# EAGLE board SparkFun_IMU_Breakout_ICM-20948_FET_EVAL-Panel (EAGLE 9.1.3), part 1 of 2
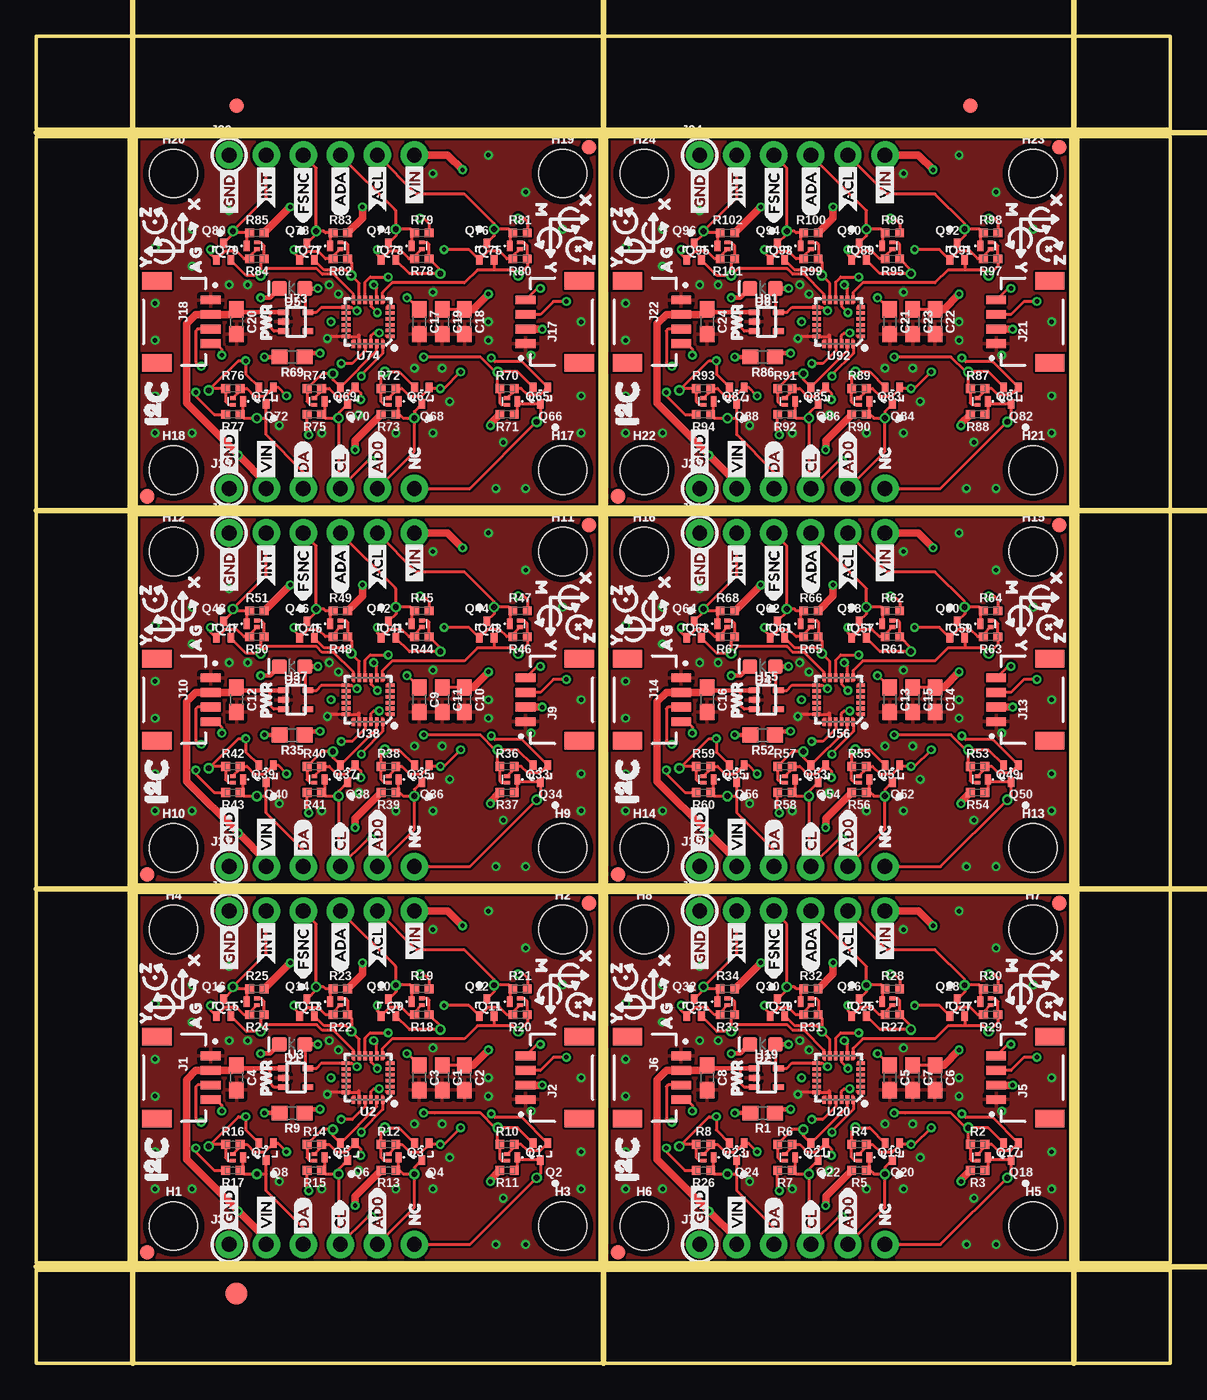
[diagram p0: board, top side]
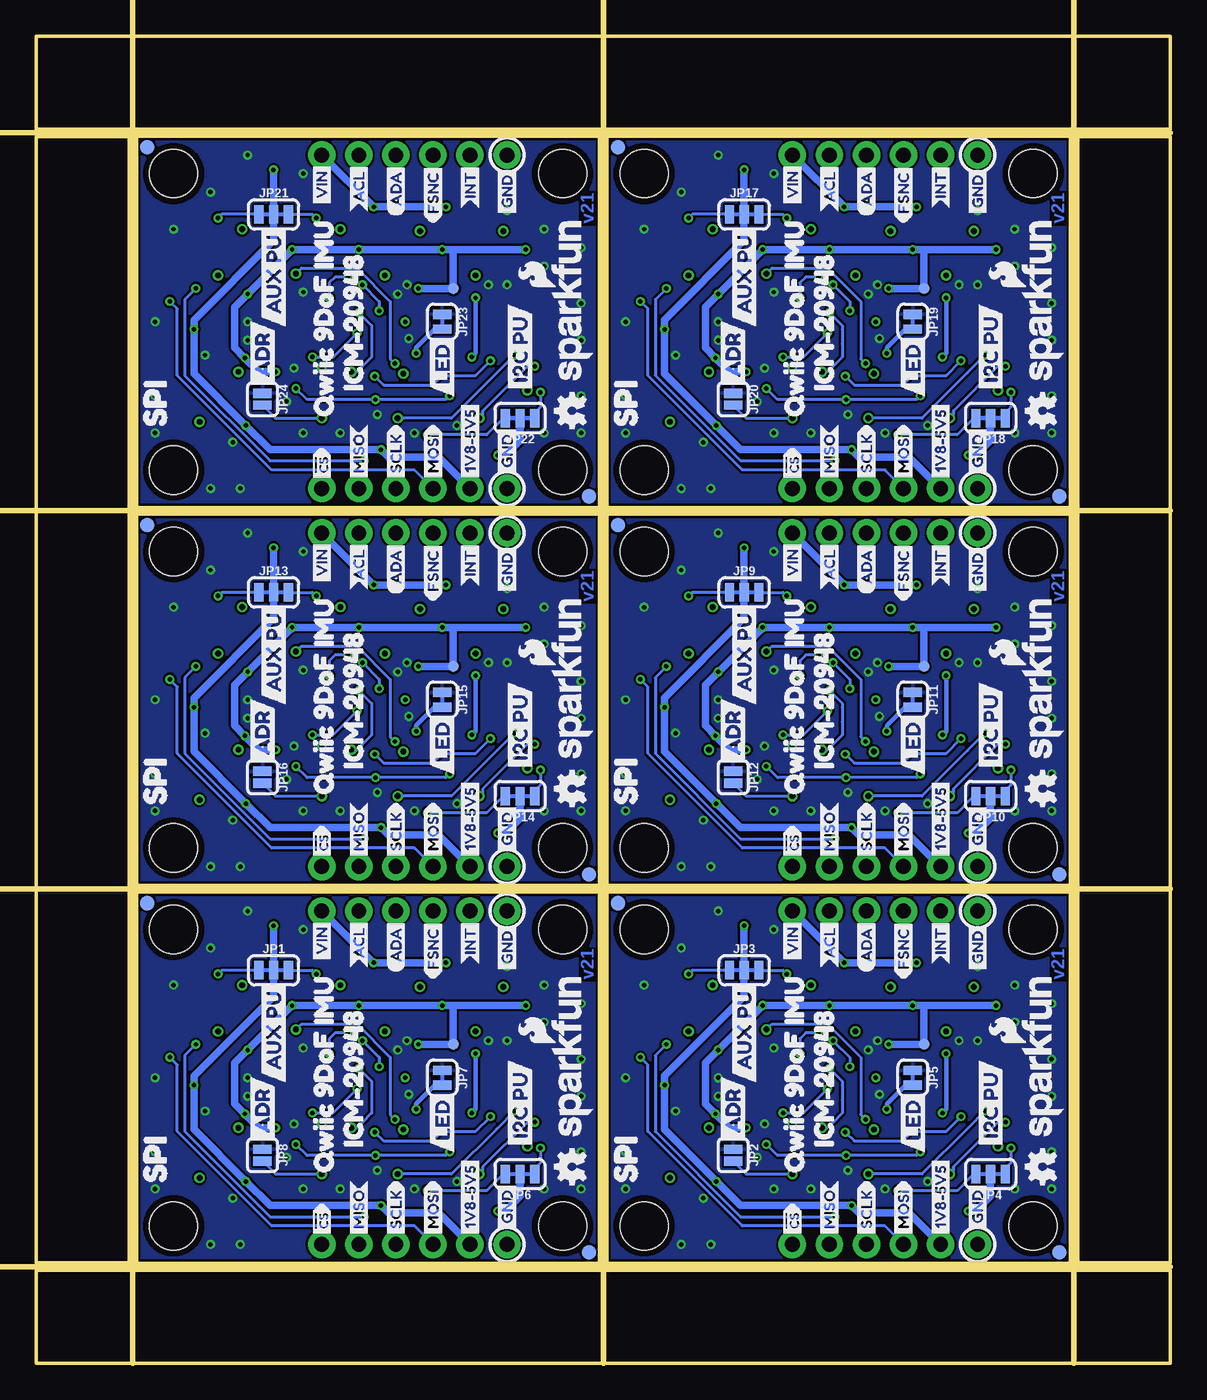
[diagram p1: board, bottom side, seen from below]

Size 77.72 x 90.93 mm. Coordinates in mm from the lower left corner, seen from the top.
Outline: 6.86,6.86 6.86,32.26 38.61,32.26 38.61,6.86 6.86,6.86
Outline: 39.12,6.86 39.12,32.26 70.87,32.26 70.87,6.86 39.12,6.86
Outline: 6.86,32.77 6.86,58.17 38.61,58.17 38.61,32.77 6.86,32.77
Outline: 39.12,32.77 39.12,58.17 70.87,58.17 70.87,32.77 39.12,32.77
Outline: 6.86,58.67 6.86,84.07 38.61,84.07 38.61,58.67 6.86,58.67
Outline: 39.12,58.67 39.12,84.07 70.87,84.07 70.87,58.67 39.12,58.67
Outline: 0,6.35 77.72,6.35 77.72,0 0,0 0,6.35
Outline: 71.37,84.07 77.72,84.07 77.72,6.86 71.37,6.86 71.37,84.07
Outline: 0,90.93 77.72,90.93 77.72,84.58 0,84.58 0,90.93
Outline: 0,84.07 6.35,84.07 6.35,6.86 0,6.86 0,84.07
Copper layers (1*16): Top 0.035mm / dielectric 1.5mm / Bottom 0.035mm
Design rules "SparkFun-2-layer-PCBWay-LIMIT": minimum track width 6mil, minimum drill 0.3mm, track to track 6mil, track to pad 6mil, pad to pad 6mil, via to via 6mil, smd to smd 6mil, copper to edge 6mil, drill to drill 6mil, minimum pad ring 6mil, minimum via ring 6mil, stop-mask expansion 4mil, vias tented up to drill 25mil, thermal gap 10mil
Milling: 7 lines

## Footprints (pad centres in the part's own frame; a part is rotated, then mirrored left to right if it is on the bottom)
0603 = smd 1.1 x 1: 1 -0.85,0; 2 0.85,0
LED-0603 = smd 1 x 1: A -0.877,0; C 0.877,0
FIDUCIAL-1X2 = smd 1 x 1: 1 0,0
FIDUCIAL-1.5X3 = smd 1.5 x 1.5: 1 0,0
STAND-OFF = hole 3.302: 0,0
JST04_1MM_RA = smd 0.6 x 1.35: 1 -1.5,0; 2 -0.5,0; 3 0.5,0; 4 1.5,0 | smd 1.2 x 2: NC1 2.8,-3.675; NC2 -2.8,-3.675
1X06_NO_SILK = drill 1.016 pad 1.88: 1 0,0; 2 2.54,0; 3 5.08,0; 4 7.62,0; 5 10.16,0; 6 12.7,0
SMT-JUMPER_3_2-NC_TRACE_SILK = smd 0.635 x 1.27: 1 -1.016,0; 2 0,0; 3 1.016,0
SMT-JUMPER_2_NO_SILK = smd 0.635 x 1.27: 1 -0.406,0; 2 0.406,0
SMT-JUMPER_2_NC_TRACE_SILK = smd 0.635 x 1.27: 1 -0.508,0; 2 0.508,0
AP02001 = smd 0.4 x 0.7: D 0.7,0 | smd 0.4 x 0.25: G 0,0.225; S 0,-0.225
SOT-416FL = smd 0.46 x 0.65: 1 -0.5,-1.1; 2 0.5,-1.1; 3 0,0.05
0402-TIGHT = smd 0.6 x 0.6: 1 -0.5,0; 2 0.5,0
PAD.03X.03 = smd 0.762 x 0.762: P$1 0,0
MINI_TEST_POINT = drill 0.4: P$1 0,0
QFN24-3X3 = smd 0.495 x 0.25: 1 -1.552,1; 6 -1.552,-1; 13 1.552,-1; 18 1.552,1 | smd 0.6 x 0.25: 2 -1.5,0.6; 3 -1.5,0.2; 4 -1.5,-0.2; 5 -1.5,-0.6; 14 1.5,-0.6; 15 1.5,-0.2; 16 1.5,0.2; 17 1.5,0.6 | smd 0.25 x 0.495: 7 -1,-1.552; 12 1,-1.552; 19 1,1.552; 24 -1,1.552 | smd 0.25 x 0.6: 8 -0.6,-1.5; 9 -0.2,-1.5; 10 0.2,-1.5; 11 0.6,-1.5; 20 0.6,1.5; 21 0.2,1.5; 22 -0.2,1.5; 23 -0.6,1.5
SC70 = smd 0.4 x 0.75: 1 -0.65,-0.825; 2 0,-0.825; 3 0.65,-0.825; 4 0.65,0.825; 5 -0.65,0.825

## Placement (x,y rotation side)
C1  1.0uF  [0603]  27.81,19.56 270 top
C2  0.1uF  [0603]  29.34,19.56 270 top
C3  0.1uF  [0603]  26.24,19.56 270 top
C4  1.0uF  [0603]  13.72,19.56 270 top
C5  0.1uF  [0603]  58.5,19.56 270 top
C6  0.1uF  [0603]  61.59,19.56 270 top
C7  1.0uF  [0603]  60.07,19.56 270 top
C8  1.0uF  [0603]  45.97,19.56 270 top
C9  0.1uF  [0603]  26.24,45.47 270 top
C10  0.1uF  [0603]  29.34,45.47 270 top
C11  1.0uF  [0603]  27.81,45.47 270 top
C12  1.0uF  [0603]  13.72,45.47 270 top
C13  0.1uF  [0603]  58.5,45.47 270 top
C14  0.1uF  [0603]  61.59,45.47 270 top
C15  1.0uF  [0603]  60.07,45.47 270 top
C16  1.0uF  [0603]  45.97,45.47 270 top
C17  0.1uF  [0603]  26.24,71.37 270 top
C18  0.1uF  [0603]  29.34,71.37 270 top
C19  1.0uF  [0603]  27.81,71.37 270 top
C20  1.0uF  [0603]  13.72,71.37 270 top
C21  0.1uF  [0603]  58.5,71.37 270 top
C22  0.1uF  [0603]  61.59,71.37 270 top
C23  1.0uF  [0603]  60.07,71.37 270 top
C24  1.0uF  [0603]  45.97,71.37 270 top
D1  RED  [LED-0603]  17.53,21.84 180 top
D2  RED  [LED-0603]  49.78,21.84 180 top
D3  RED  [LED-0603]  17.53,47.75 180 top
D4  RED  [LED-0603]  49.78,47.75 180 top
D5  RED  [LED-0603]  17.53,73.66 180 top
D6  RED  [LED-0603]  49.78,73.66 180 top
E$1  [FIDUCIAL-1X2]  13.72,86.17 0 top
E$2  [FIDUCIAL-1X2]  64.01,86.17 0 top
E$3  [FIDUCIAL-1.5X3]  13.72,4.76 0 top
FD1  FIDUCIAL1X2  [FIDUCIAL-1X2]  7.59,7.59 0 bottom
FD2  FIDUCIAL1X2  [FIDUCIAL-1X2]  37.87,31.52 0 bottom
FD3  FIDUCIAL1X2  [FIDUCIAL-1X2]  37.87,31.52 0 top
FD4  FIDUCIAL1X2  [FIDUCIAL-1X2]  7.59,7.59 0 top
FD5  FIDUCIAL1X2  [FIDUCIAL-1X2]  70.13,31.52 0 top
FD6  FIDUCIAL1X2  [FIDUCIAL-1X2]  39.85,7.59 0 bottom
FD7  FIDUCIAL1X2  [FIDUCIAL-1X2]  70.13,31.52 0 bottom
FD8  FIDUCIAL1X2  [FIDUCIAL-1X2]  39.85,7.59 0 top
FD9  FIDUCIAL1X2  [FIDUCIAL-1X2]  37.87,57.43 0 top
FD10  FIDUCIAL1X2  [FIDUCIAL-1X2]  7.59,33.5 0 bottom
FD11  FIDUCIAL1X2  [FIDUCIAL-1X2]  37.87,57.43 0 bottom
FD12  FIDUCIAL1X2  [FIDUCIAL-1X2]  7.59,33.5 0 top
FD13  FIDUCIAL1X2  [FIDUCIAL-1X2]  70.13,57.43 0 top
FD14  FIDUCIAL1X2  [FIDUCIAL-1X2]  39.85,33.5 0 bottom
FD15  FIDUCIAL1X2  [FIDUCIAL-1X2]  70.13,57.43 0 bottom
FD16  FIDUCIAL1X2  [FIDUCIAL-1X2]  39.85,33.5 0 top
FD17  FIDUCIAL1X2  [FIDUCIAL-1X2]  37.87,83.34 0 top
FD18  FIDUCIAL1X2  [FIDUCIAL-1X2]  7.59,59.41 0 bottom
FD19  FIDUCIAL1X2  [FIDUCIAL-1X2]  37.87,83.34 0 bottom
FD20  FIDUCIAL1X2  [FIDUCIAL-1X2]  7.59,59.41 0 top
FD21  FIDUCIAL1X2  [FIDUCIAL-1X2]  70.13,83.34 0 top
FD22  FIDUCIAL1X2  [FIDUCIAL-1X2]  39.85,59.41 0 bottom
FD23  FIDUCIAL1X2  [FIDUCIAL-1X2]  70.13,83.34 0 bottom
FD24  FIDUCIAL1X2  [FIDUCIAL-1X2]  39.85,59.41 0 top
H1  STAND-OFF  [STAND-OFF]  9.4,9.4 0 top
H2  STAND-OFF  [STAND-OFF]  36.07,29.72 0 top
H3  STAND-OFF  [STAND-OFF]  36.07,9.4 0 top
H4  STAND-OFF  [STAND-OFF]  9.4,29.72 0 top
H5  STAND-OFF  [STAND-OFF]  68.33,9.4 0 top
H6  STAND-OFF  [STAND-OFF]  41.66,9.4 0 top
H7  STAND-OFF  [STAND-OFF]  68.33,29.72 0 top
H8  STAND-OFF  [STAND-OFF]  41.66,29.72 0 top
H9  STAND-OFF  [STAND-OFF]  36.07,35.31 0 top
H10  STAND-OFF  [STAND-OFF]  9.4,35.31 0 top
H11  STAND-OFF  [STAND-OFF]  36.07,55.63 0 top
H12  STAND-OFF  [STAND-OFF]  9.4,55.63 0 top
H13  STAND-OFF  [STAND-OFF]  68.33,35.31 0 top
H14  STAND-OFF  [STAND-OFF]  41.66,35.31 0 top
H15  STAND-OFF  [STAND-OFF]  68.33,55.63 0 top
H16  STAND-OFF  [STAND-OFF]  41.66,55.63 0 top
H17  STAND-OFF  [STAND-OFF]  36.07,61.21 0 top
H18  STAND-OFF  [STAND-OFF]  9.4,61.21 0 top
H19  STAND-OFF  [STAND-OFF]  36.07,81.53 0 top
H20  STAND-OFF  [STAND-OFF]  9.4,81.53 0 top
H21  STAND-OFF  [STAND-OFF]  68.33,61.21 0 top
H22  STAND-OFF  [STAND-OFF]  41.66,61.21 0 top
H23  STAND-OFF  [STAND-OFF]  68.33,81.53 0 top
H24  STAND-OFF  [STAND-OFF]  41.66,81.53 0 top
J1  [JST04_1MM_RA]  11.94,19.56 270 top
J2  [JST04_1MM_RA]  33.53,19.56 90 top
J3  [1X06_NO_SILK]  13.21,8.13 0 top
J4  [1X06_NO_SILK]  13.21,30.99 0 top
J5  [JST04_1MM_RA]  65.79,19.56 90 top
J6  [JST04_1MM_RA]  44.2,19.56 270 top
J7  [1X06_NO_SILK]  45.47,8.13 0 top
J8  [1X06_NO_SILK]  45.47,30.99 0 top
J9  [JST04_1MM_RA]  33.53,45.47 90 top
J10  [JST04_1MM_RA]  11.94,45.47 270 top
J11  [1X06_NO_SILK]  13.21,34.04 0 top
J12  [1X06_NO_SILK]  13.21,56.9 0 top
J13  [JST04_1MM_RA]  65.79,45.47 90 top
J14  [JST04_1MM_RA]  44.2,45.47 270 top
J15  [1X06_NO_SILK]  45.47,34.04 0 top
J16  [1X06_NO_SILK]  45.47,56.9 0 top
J17  [JST04_1MM_RA]  33.53,71.37 90 top
J18  [JST04_1MM_RA]  11.94,71.37 270 top
J19  [1X06_NO_SILK]  13.21,59.94 0 top
J20  [1X06_NO_SILK]  13.21,82.8 0 top
J21  [JST04_1MM_RA]  65.79,71.37 90 top
J22  [JST04_1MM_RA]  44.2,71.37 270 top
J23  [1X06_NO_SILK]  45.47,59.94 0 top
J24  [1X06_NO_SILK]  45.47,82.8 0 top
JP1  AUX  [SMT-JUMPER_3_2-NC_TRACE_SILK]  61.47,26.92 0 bottom
JP2  ADR  [SMT-JUMPER_2_NO_SILK]  29.97,14.25 270 bottom
JP3  AUX  [SMT-JUMPER_3_2-NC_TRACE_SILK]  29.21,26.92 0 bottom
JP4  I2C PU  [SMT-JUMPER_3_2-NC_TRACE_SILK]  12.32,12.95 180 bottom
JP5  LED  [SMT-JUMPER_2_NC_TRACE_SILK]  17.65,19.56 270 bottom
JP6  I2C PU  [SMT-JUMPER_3_2-NC_TRACE_SILK]  44.58,12.95 180 bottom
JP7  LED  [SMT-JUMPER_2_NC_TRACE_SILK]  49.91,19.56 270 bottom
JP8  ADR  [SMT-JUMPER_2_NO_SILK]  62.23,14.25 270 bottom
JP9  AUX  [SMT-JUMPER_3_2-NC_TRACE_SILK]  29.21,52.83 0 bottom
JP10  I2C PU  [SMT-JUMPER_3_2-NC_TRACE_SILK]  12.32,38.86 180 bottom
JP11  LED  [SMT-JUMPER_2_NC_TRACE_SILK]  17.65,45.47 270 bottom
JP12  ADR  [SMT-JUMPER_2_NO_SILK]  29.97,40.16 270 bottom
JP13  AUX  [SMT-JUMPER_3_2-NC_TRACE_SILK]  61.47,52.83 0 bottom
JP14  I2C PU  [SMT-JUMPER_3_2-NC_TRACE_SILK]  44.58,38.86 180 bottom
JP15  LED  [SMT-JUMPER_2_NC_TRACE_SILK]  49.91,45.47 270 bottom
JP16  ADR  [SMT-JUMPER_2_NO_SILK]  62.23,40.16 270 bottom
JP17  AUX  [SMT-JUMPER_3_2-NC_TRACE_SILK]  29.21,78.74 0 bottom
JP18  I2C PU  [SMT-JUMPER_3_2-NC_TRACE_SILK]  12.32,64.77 180 bottom
JP19  LED  [SMT-JUMPER_2_NC_TRACE_SILK]  17.65,71.37 270 bottom
JP20  ADR  [SMT-JUMPER_2_NO_SILK]  29.97,66.07 270 bottom
JP21  AUX  [SMT-JUMPER_3_2-NC_TRACE_SILK]  61.47,78.74 0 bottom
JP22  I2C PU  [SMT-JUMPER_3_2-NC_TRACE_SILK]  44.58,64.77 180 bottom
JP23  LED  [SMT-JUMPER_2_NC_TRACE_SILK]  49.91,71.37 270 bottom
JP24  ADR  [SMT-JUMPER_2_NO_SILK]  62.23,66.07 270 bottom
LOGO1  SFE_LOGO_NAME_FLAME.1_INCH  [SFE_LOGO_NAME_FLAME_.1]  8.76,21.08 90 bottom
LOGO2  OSHW-LOGOMINI  [OSHW-LOGO-MINI]  8.76,13.46 90 bottom
LOGO3  SFE_LOGO_NAME_FLAME.1_INCH  [SFE_LOGO_NAME_FLAME_.1]  41.02,21.08 90 bottom
LOGO4  OSHW-LOGOMINI  [OSHW-LOGO-MINI]  41.02,13.46 90 bottom
LOGO5  SFE_LOGO_NAME_FLAME.1_INCH  [SFE_LOGO_NAME_FLAME_.1]  8.76,46.99 90 bottom
LOGO6  OSHW-LOGOMINI  [OSHW-LOGO-MINI]  8.76,39.37 90 bottom
LOGO7  SFE_LOGO_NAME_FLAME.1_INCH  [SFE_LOGO_NAME_FLAME_.1]  41.02,46.99 90 bottom
LOGO8  OSHW-LOGOMINI  [OSHW-LOGO-MINI]  41.02,39.37 90 bottom
LOGO9  SFE_LOGO_NAME_FLAME.1_INCH  [SFE_LOGO_NAME_FLAME_.1]  8.76,72.9 90 bottom
LOGO10  OSHW-LOGOMINI  [OSHW-LOGO-MINI]  8.76,65.28 90 bottom
LOGO11  SFE_LOGO_NAME_FLAME.1_INCH  [SFE_LOGO_NAME_FLAME_.1]  41.02,72.9 90 bottom
LOGO12  OSHW-LOGOMINI  [OSHW-LOGO-MINI]  41.02,65.28 90 bottom
Q1  DMN2005LP4K-7  [AP02001]  32.26,14.1 0 top
Q2  RE1C002UN  [SOT-416FL]  34.54,13.97 180 top
Q3  DMN2005LP4K-7  [AP02001]  24.13,14.1 0 top
Q4  RE1C002UN  [SOT-416FL]  26.42,13.97 180 top
Q5  DMN2005LP4K-7  [AP02001]  19.05,14.1 0 top
Q6  RE1C002UN  [SOT-416FL]  21.34,13.97 180 top
Q7  DMN2005LP4K-7  [AP02001]  13.46,14.1 0 top
Q8  RE1C002UN  [SOT-416FL]  15.75,13.97 180 top
Q9  DMN2005LP4K-7  [AP02001]  26.42,24.77 180 top
Q10  RE1C002UN  [SOT-416FL]  24.13,24.89 0 top
Q11  DMN2005LP4K-7  [AP02001]  33.15,24.77 180 top
Q12  RE1C002UN  [SOT-416FL]  30.86,24.89 0 top
Q13  DMN2005LP4K-7  [AP02001]  20.83,24.77 180 top
Q14  RE1C002UN  [SOT-416FL]  18.54,24.89 0 top
Q15  DMN2005LP4K-7  [AP02001]  15.11,24.77 180 top
Q16  RE1C002UN  [SOT-416FL]  12.83,24.89 0 top
Q17  DMN2005LP4K-7  [AP02001]  64.52,14.1 0 top
Q18  RE1C002UN  [SOT-416FL]  66.8,13.97 180 top
Q19  DMN2005LP4K-7  [AP02001]  56.39,14.1 0 top
Q20  RE1C002UN  [SOT-416FL]  58.67,13.97 180 top
Q21  DMN2005LP4K-7  [AP02001]  51.31,14.1 0 top
Q22  RE1C002UN  [SOT-416FL]  53.59,13.97 180 top
Q23  DMN2005LP4K-7  [AP02001]  45.72,14.1 0 top
Q24  RE1C002UN  [SOT-416FL]  48.01,13.97 180 top
Q25  DMN2005LP4K-7  [AP02001]  58.67,24.77 180 top
Q26  RE1C002UN  [SOT-416FL]  56.39,24.89 0 top
Q27  DMN2005LP4K-7  [AP02001]  65.41,24.77 180 top
Q28  RE1C002UN  [SOT-416FL]  63.12,24.89 0 top
Q29  DMN2005LP4K-7  [AP02001]  53.09,24.77 180 top
Q30  RE1C002UN  [SOT-416FL]  50.8,24.89 0 top
Q31  DMN2005LP4K-7  [AP02001]  47.37,24.77 180 top
Q32  RE1C002UN  [SOT-416FL]  45.08,24.89 0 top
Q33  DMN2005LP4K-7  [AP02001]  32.26,40 0 top
Q34  RE1C002UN  [SOT-416FL]  34.54,39.88 180 top
Q35  DMN2005LP4K-7  [AP02001]  24.13,40 0 top
Q36  RE1C002UN  [SOT-416FL]  26.42,39.88 180 top
Q37  DMN2005LP4K-7  [AP02001]  19.05,40 0 top
Q38  RE1C002UN  [SOT-416FL]  21.34,39.88 180 top
Q39  DMN2005LP4K-7  [AP02001]  13.46,40 0 top
Q40  RE1C002UN  [SOT-416FL]  15.75,39.88 180 top
Q41  DMN2005LP4K-7  [AP02001]  26.42,50.67 180 top
Q42  RE1C002UN  [SOT-416FL]  24.13,50.8 0 top
Q43  DMN2005LP4K-7  [AP02001]  33.15,50.67 180 top
Q44  RE1C002UN  [SOT-416FL]  30.86,50.8 0 top
Q45  DMN2005LP4K-7  [AP02001]  20.83,50.67 180 top
Q46  RE1C002UN  [SOT-416FL]  18.54,50.8 0 top
Q47  DMN2005LP4K-7  [AP02001]  15.11,50.67 180 top
Q48  RE1C002UN  [SOT-416FL]  12.83,50.8 0 top
Q49  DMN2005LP4K-7  [AP02001]  64.52,40 0 top
Q50  RE1C002UN  [SOT-416FL]  66.8,39.88 180 top
Q51  DMN2005LP4K-7  [AP02001]  56.39,40 0 top
Q52  RE1C002UN  [SOT-416FL]  58.67,39.88 180 top
Q53  DMN2005LP4K-7  [AP02001]  51.31,40 0 top
Q54  RE1C002UN  [SOT-416FL]  53.59,39.88 180 top
Q55  DMN2005LP4K-7  [AP02001]  45.72,40 0 top
Q56  RE1C002UN  [SOT-416FL]  48.01,39.88 180 top
Q57  DMN2005LP4K-7  [AP02001]  58.67,50.67 180 top
Q58  RE1C002UN  [SOT-416FL]  56.39,50.8 0 top
Q59  DMN2005LP4K-7  [AP02001]  65.41,50.67 180 top
Q60  RE1C002UN  [SOT-416FL]  63.12,50.8 0 top
Q61  DMN2005LP4K-7  [AP02001]  53.09,50.67 180 top
Q62  RE1C002UN  [SOT-416FL]  50.8,50.8 0 top
Q63  DMN2005LP4K-7  [AP02001]  47.37,50.67 180 top
Q64  RE1C002UN  [SOT-416FL]  45.08,50.8 0 top
Q65  DMN2005LP4K-7  [AP02001]  32.26,65.91 0 top
Q66  RE1C002UN  [SOT-416FL]  34.54,65.79 180 top
Q67  DMN2005LP4K-7  [AP02001]  24.13,65.91 0 top
Q68  RE1C002UN  [SOT-416FL]  26.42,65.79 180 top
Q69  DMN2005LP4K-7  [AP02001]  19.05,65.91 0 top
Q70  RE1C002UN  [SOT-416FL]  21.34,65.79 180 top
Q71  DMN2005LP4K-7  [AP02001]  13.46,65.91 0 top
Q72  RE1C002UN  [SOT-416FL]  15.75,65.79 180 top
Q73  DMN2005LP4K-7  [AP02001]  26.42,76.58 180 top
Q74  RE1C002UN  [SOT-416FL]  24.13,76.71 0 top
Q75  DMN2005LP4K-7  [AP02001]  33.15,76.58 180 top
Q76  RE1C002UN  [SOT-416FL]  30.86,76.71 0 top
Q77  DMN2005LP4K-7  [AP02001]  20.83,76.58 180 top
Q78  RE1C002UN  [SOT-416FL]  18.54,76.71 0 top
Q79  DMN2005LP4K-7  [AP02001]  15.11,76.58 180 top
Q80  RE1C002UN  [SOT-416FL]  12.83,76.71 0 top
Q81  DMN2005LP4K-7  [AP02001]  64.52,65.91 0 top
Q82  RE1C002UN  [SOT-416FL]  66.8,65.79 180 top
Q83  DMN2005LP4K-7  [AP02001]  56.39,65.91 0 top
Q84  RE1C002UN  [SOT-416FL]  58.67,65.79 180 top
Q85  DMN2005LP4K-7  [AP02001]  51.31,65.91 0 top
Q86  RE1C002UN  [SOT-416FL]  53.59,65.79 180 top
Q87  DMN2005LP4K-7  [AP02001]  45.72,65.91 0 top
Q88  RE1C002UN  [SOT-416FL]  48.01,65.79 180 top
Q89  DMN2005LP4K-7  [AP02001]  58.67,76.58 180 top
Q90  RE1C002UN  [SOT-416FL]  56.39,76.71 0 top
Q91  DMN2005LP4K-7  [AP02001]  65.41,76.58 180 top
Q92  RE1C002UN  [SOT-416FL]  63.12,76.71 0 top
Q93  DMN2005LP4K-7  [AP02001]  53.09,76.58 180 top
Q94  RE1C002UN  [SOT-416FL]  50.8,76.71 0 top
Q95  DMN2005LP4K-7  [AP02001]  47.37,76.58 180 top
Q96  RE1C002UN  [SOT-416FL]  45.08,76.71 0 top
R1  470  [0603]  49.78,17.14 180 top
R2  2.2k  [0402-TIGHT]  64.52,14.99 0 top
R3  2.2k  [0402-TIGHT]  64.52,13.21 180 top
R4  2.2k  [0402-TIGHT]  56.39,14.99 0 top
R5  2.2k  [0402-TIGHT]  56.39,13.21 180 top
R6  2.2k  [0402-TIGHT]  51.31,14.99 0 top
R7  2.2k  [0402-TIGHT]  51.31,13.21 180 top
R8  2.2k  [0402-TIGHT]  45.72,14.99 0 top
R9  470  [0603]  17.53,17.14 180 top
R10  2.2k  [0402-TIGHT]  32.26,14.99 0 top
R11  2.2k  [0402-TIGHT]  32.26,13.21 180 top
R12  2.2k  [0402-TIGHT]  24.13,14.99 0 top
R13  2.2k  [0402-TIGHT]  24.13,13.21 180 top
R14  2.2k  [0402-TIGHT]  19.05,14.99 0 top
R15  2.2k  [0402-TIGHT]  19.05,13.21 180 top
R16  2.2k  [0402-TIGHT]  13.46,14.99 0 top
R17  2.2k  [0402-TIGHT]  13.46,13.21 180 top
R18  2.2k  [0402-TIGHT]  26.42,23.88 180 top
R19  2.2k  [0402-TIGHT]  26.42,25.65 0 top
R20  2.2k  [0402-TIGHT]  33.15,23.88 180 top
R21  2.2k  [0402-TIGHT]  33.15,25.65 0 top
R22  2.2k  [0402-TIGHT]  20.83,23.88 180 top
R23  2.2k  [0402-TIGHT]  20.83,25.65 0 top
R24  2.2k  [0402-TIGHT]  15.11,23.88 180 top
R25  2.2k  [0402-TIGHT]  15.11,25.65 0 top
R26  2.2k  [0402-TIGHT]  45.72,13.21 180 top
R27  2.2k  [0402-TIGHT]  58.67,23.88 180 top
R28  2.2k  [0402-TIGHT]  58.67,25.65 0 top
R29  2.2k  [0402-TIGHT]  65.41,23.88 180 top
R30  2.2k  [0402-TIGHT]  65.41,25.65 0 top
R31  2.2k  [0402-TIGHT]  53.09,23.88 180 top
R32  2.2k  [0402-TIGHT]  53.09,25.65 0 top
R33  2.2k  [0402-TIGHT]  47.37,23.88 180 top
R34  2.2k  [0402-TIGHT]  47.37,25.65 0 top
R35  470  [0603]  17.53,43.05 180 top
R36  2.2k  [0402-TIGHT]  32.26,40.89 0 top
R37  2.2k  [0402-TIGHT]  32.26,39.12 180 top
R38  2.2k  [0402-TIGHT]  24.13,40.89 0 top
R39  2.2k  [0402-TIGHT]  24.13,39.12 180 top
R40  2.2k  [0402-TIGHT]  19.05,40.89 0 top
R41  2.2k  [0402-TIGHT]  19.05,39.12 180 top
R42  2.2k  [0402-TIGHT]  13.46,40.89 0 top
R43  2.2k  [0402-TIGHT]  13.46,39.12 180 top
R44  2.2k  [0402-TIGHT]  26.42,49.78 180 top
R45  2.2k  [0402-TIGHT]  26.42,51.56 0 top
R46  2.2k  [0402-TIGHT]  33.15,49.78 180 top
R47  2.2k  [0402-TIGHT]  33.15,51.56 0 top
R48  2.2k  [0402-TIGHT]  20.83,49.78 180 top
R49  2.2k  [0402-TIGHT]  20.83,51.56 0 top
R50  2.2k  [0402-TIGHT]  15.11,49.78 180 top
R51  2.2k  [0402-TIGHT]  15.11,51.56 0 top
R52  470  [0603]  49.78,43.05 180 top
R53  2.2k  [0402-TIGHT]  64.52,40.89 0 top
R54  2.2k  [0402-TIGHT]  64.52,39.12 180 top
R55  2.2k  [0402-TIGHT]  56.39,40.89 0 top
R56  2.2k  [0402-TIGHT]  56.39,39.12 180 top
R57  2.2k  [0402-TIGHT]  51.31,40.89 0 top
R58  2.2k  [0402-TIGHT]  51.31,39.12 180 top
R59  2.2k  [0402-TIGHT]  45.72,40.89 0 top
R60  2.2k  [0402-TIGHT]  45.72,39.12 180 top
R61  2.2k  [0402-TIGHT]  58.67,49.78 180 top
R62  2.2k  [0402-TIGHT]  58.67,51.56 0 top
R63  2.2k  [0402-TIGHT]  65.41,49.78 180 top
R64  2.2k  [0402-TIGHT]  65.41,51.56 0 top
R65  2.2k  [0402-TIGHT]  53.09,49.78 180 top
R66  2.2k  [0402-TIGHT]  53.09,51.56 0 top
R67  2.2k  [0402-TIGHT]  47.37,49.78 180 top
R68  2.2k  [0402-TIGHT]  47.37,51.56 0 top
R69  470  [0603]  17.53,68.96 180 top
R70  2.2k  [0402-TIGHT]  32.26,66.8 0 top
R71  2.2k  [0402-TIGHT]  32.26,65.02 180 top
R72  2.2k  [0402-TIGHT]  24.13,66.8 0 top
R73  2.2k  [0402-TIGHT]  24.13,65.02 180 top
R74  2.2k  [0402-TIGHT]  19.05,66.8 0 top
R75  2.2k  [0402-TIGHT]  19.05,65.02 180 top
R76  2.2k  [0402-TIGHT]  13.46,66.8 0 top
R77  2.2k  [0402-TIGHT]  13.46,65.02 180 top
R78  2.2k  [0402-TIGHT]  26.42,75.69 180 top
R79  2.2k  [0402-TIGHT]  26.42,77.47 0 top
R80  2.2k  [0402-TIGHT]  33.15,75.69 180 top
R81  2.2k  [0402-TIGHT]  33.15,77.47 0 top
R82  2.2k  [0402-TIGHT]  20.83,75.69 180 top
R83  2.2k  [0402-TIGHT]  20.83,77.47 0 top
R84  2.2k  [0402-TIGHT]  15.11,75.69 180 top
R85  2.2k  [0402-TIGHT]  15.11,77.47 0 top
R86  470  [0603]  49.78,68.96 180 top
R87  2.2k  [0402-TIGHT]  64.52,66.8 0 top
R88  2.2k  [0402-TIGHT]  64.52,65.02 180 top
R89  2.2k  [0402-TIGHT]  56.39,66.8 0 top
R90  2.2k  [0402-TIGHT]  56.39,65.02 180 top
R91  2.2k  [0402-TIGHT]  51.31,66.8 0 top
R92  2.2k  [0402-TIGHT]  51.31,65.02 180 top
R93  2.2k  [0402-TIGHT]  45.72,66.8 0 top
R94  2.2k  [0402-TIGHT]  45.72,65.02 180 top
R95  2.2k  [0402-TIGHT]  58.67,75.69 180 top
R96  2.2k  [0402-TIGHT]  58.67,77.47 0 top
R97  2.2k  [0402-TIGHT]  65.41,75.69 180 top
R98  2.2k  [0402-TIGHT]  65.41,77.47 0 top
R99  2.2k  [0402-TIGHT]  53.09,75.69 180 top
R100  2.2k  [0402-TIGHT]  53.09,77.47 0 top
R101  2.2k  [0402-TIGHT]  47.37,75.69 180 top
R102  2.2k  [0402-TIGHT]  47.37,77.47 0 top
TP1  1.8V  [PAD.03X.03]  16.89,21.84 90 bottom
TP2  1.8V  [PAD.03X.03]  49.15,21.84 90 bottom
TP3  1.8V  [PAD.03X.03]  16.89,47.75 90 bottom
TP4  1.8V  [PAD.03X.03]  49.15,47.75 90 bottom
TP5  1.8V  [PAD.03X.03]  16.89,73.66 90 bottom
TP6  1.8V  [PAD.03X.03]  49.15,73.66 90 bottom
U1  TP  [MINI_TEST_POINT]  27.69,22.86 180 top
U2  9DoF IMU  [QFN24-3X3]  22.73,19.56 180 top
U3  1.8V/100mA  [SC70]  17.78,19.56 270 top
U4  TP  [MINI_TEST_POINT]  24.64,25.91 180 top
U5  TP  [MINI_TEST_POINT]  33.02,22.73 180 top
U6  TP  [MINI_TEST_POINT]  31.37,25.91 180 top
U7  TP  [MINI_TEST_POINT]  19.18,25.78 180 top
U8  TP  [MINI_TEST_POINT]  21.59,22.73 180 top
U9  TP  [MINI_TEST_POINT]  15.37,22.73 180 top
U10  TP  [MINI_TEST_POINT]  13.46,25.78 180 top
U11  TP  [MINI_TEST_POINT]  11.81,14.86 0 top
U12  TP  [MINI_TEST_POINT]  15.11,12.95 0 top
U13  TP  [MINI_TEST_POINT]  20.32,16 0 top
U14  TP  [MINI_TEST_POINT]  20.7,12.95 0 top
U15  TP  [MINI_TEST_POINT]  23.88,16.13 0 top
U16  TP  [MINI_TEST_POINT]  25.91,12.95 0 top
U17  TP  [MINI_TEST_POINT]  31.62,16.13 0 top
U18  TP  [MINI_TEST_POINT]  34.29,12.7 0 top
U19  1.8V/100mA  [SC70]  50.04,19.56 270 top
U20  9DoF IMU  [QFN24-3X3]  54.99,19.56 180 top
U21  TP  [MINI_TEST_POINT]  59.94,22.86 180 top
U22  TP  [MINI_TEST_POINT]  56.9,25.91 180 top
U23  TP  [MINI_TEST_POINT]  65.28,22.73 180 top
U24  TP  [MINI_TEST_POINT]  63.63,25.91 180 top
U25  TP  [MINI_TEST_POINT]  51.43,25.78 180 top
U26  TP  [MINI_TEST_POINT]  53.85,22.73 180 top
U27  TP  [MINI_TEST_POINT]  47.62,22.73 180 top
U28  TP  [MINI_TEST_POINT]  45.72,25.78 180 top
U29  TP  [MINI_TEST_POINT]  44.07,14.86 0 top
U30  TP  [MINI_TEST_POINT]  47.37,12.95 0 top
U31  TP  [MINI_TEST_POINT]  52.58,16 0 top
U32  TP  [MINI_TEST_POINT]  52.96,12.95 0 top
U33  TP  [MINI_TEST_POINT]  56.13,16.13 0 top
U34  TP  [MINI_TEST_POINT]  58.17,12.95 0 top
U35  TP  [MINI_TEST_POINT]  63.88,16.13 0 top
U36  TP  [MINI_TEST_POINT]  66.55,12.7 0 top
U37  1.8V/100mA  [SC70]  17.78,45.47 270 top
U38  9DoF IMU  [QFN24-3X3]  22.73,45.47 180 top
U39  TP  [MINI_TEST_POINT]  27.69,48.77 180 top
U40  TP  [MINI_TEST_POINT]  24.64,51.82 180 top
U41  TP  [MINI_TEST_POINT]  33.02,48.64 180 top
U42  TP  [MINI_TEST_POINT]  31.37,51.82 180 top
U43  TP  [MINI_TEST_POINT]  19.18,51.69 180 top
U44  TP  [MINI_TEST_POINT]  21.59,48.64 180 top
U45  TP  [MINI_TEST_POINT]  15.37,48.64 180 top
U46  TP  [MINI_TEST_POINT]  13.46,51.69 180 top
U47  TP  [MINI_TEST_POINT]  11.81,40.77 0 top
U48  TP  [MINI_TEST_POINT]  15.11,38.86 0 top
U49  TP  [MINI_TEST_POINT]  20.32,41.91 0 top
U50  TP  [MINI_TEST_POINT]  20.7,38.86 0 top
U51  TP  [MINI_TEST_POINT]  23.88,42.04 0 top
U52  TP  [MINI_TEST_POINT]  25.91,38.86 0 top
U53  TP  [MINI_TEST_POINT]  31.62,42.04 0 top
U54  TP  [MINI_TEST_POINT]  34.29,38.61 0 top
U55  1.8V/100mA  [SC70]  50.04,45.47 270 top
U56  9DoF IMU  [QFN24-3X3]  54.99,45.47 180 top
U57  TP  [MINI_TEST_POINT]  59.94,48.77 180 top
U58  TP  [MINI_TEST_POINT]  56.9,51.82 180 top
U59  TP  [MINI_TEST_POINT]  65.28,48.64 180 top
U60  TP  [MINI_TEST_POINT]  63.63,51.82 180 top
U61  TP  [MINI_TEST_POINT]  51.43,51.69 180 top
U62  TP  [MINI_TEST_POINT]  53.85,48.64 180 top
U63  TP  [MINI_TEST_POINT]  47.62,48.64 180 top
U64  TP  [MINI_TEST_POINT]  45.72,51.69 180 top
U65  TP  [MINI_TEST_POINT]  44.07,40.77 0 top
U66  TP  [MINI_TEST_POINT]  47.37,38.86 0 top
U67  TP  [MINI_TEST_POINT]  52.58,41.91 0 top
U68  TP  [MINI_TEST_POINT]  52.96,38.86 0 top
U69  TP  [MINI_TEST_POINT]  56.13,42.04 0 top
U70  TP  [MINI_TEST_POINT]  58.17,38.86 0 top
U71  TP  [MINI_TEST_POINT]  63.88,42.04 0 top
U72  TP  [MINI_TEST_POINT]  66.55,38.61 0 top
U73  1.8V/100mA  [SC70]  17.78,71.37 270 top
U74  9DoF IMU  [QFN24-3X3]  22.73,71.37 180 top
U75  TP  [MINI_TEST_POINT]  27.69,74.68 180 top
U76  TP  [MINI_TEST_POINT]  24.64,77.72 180 top
U77  TP  [MINI_TEST_POINT]  33.02,74.55 180 top
U78  TP  [MINI_TEST_POINT]  31.37,77.72 180 top
U79  TP  [MINI_TEST_POINT]  19.18,77.6 180 top
U80  TP  [MINI_TEST_POINT]  21.59,74.55 180 top
U81  TP  [MINI_TEST_POINT]  15.37,74.55 180 top
U82  TP  [MINI_TEST_POINT]  13.46,77.6 180 top
U83  TP  [MINI_TEST_POINT]  11.81,66.67 0 top
U84  TP  [MINI_TEST_POINT]  15.11,64.77 0 top
U85  TP  [MINI_TEST_POINT]  20.32,67.82 0 top
U86  TP  [MINI_TEST_POINT]  20.7,64.77 0 top
U87  TP  [MINI_TEST_POINT]  23.88,67.95 0 top
U88  TP  [MINI_TEST_POINT]  25.91,64.77 0 top
U89  TP  [MINI_TEST_POINT]  31.62,67.95 0 top
U90  TP  [MINI_TEST_POINT]  34.29,64.52 0 top
U91  1.8V/100mA  [SC70]  50.04,71.37 270 top
U92  9DoF IMU  [QFN24-3X3]  54.99,71.37 180 top
U93  TP  [MINI_TEST_POINT]  59.94,74.68 180 top
U94  TP  [MINI_TEST_POINT]  56.9,77.72 180 top
U95  TP  [MINI_TEST_POINT]  65.28,74.55 180 top
U96  TP  [MINI_TEST_POINT]  63.63,77.72 180 top
U97  TP  [MINI_TEST_POINT]  51.43,77.6 180 top
U98  TP  [MINI_TEST_POINT]  53.85,74.55 180 top
U99  TP  [MINI_TEST_POINT]  47.62,74.55 180 top
U100  TP  [MINI_TEST_POINT]  45.72,77.6 180 top
U101  TP  [MINI_TEST_POINT]  44.07,66.67 0 top
U102  TP  [MINI_TEST_POINT]  47.37,64.77 0 top
U103  TP  [MINI_TEST_POINT]  52.58,67.82 0 top
U104  TP  [MINI_TEST_POINT]  52.96,64.77 0 top
U105  TP  [MINI_TEST_POINT]  56.13,67.95 0 top
U106  TP  [MINI_TEST_POINT]  58.17,64.77 0 top
U107  TP  [MINI_TEST_POINT]  63.88,67.95 0 top
U108  TP  [MINI_TEST_POINT]  66.55,64.52 0 top
U$1  [GND4]  13.21,8.89 90 bottom
U$2  [GND4]  13.21,26.67 90 bottom
U$3  [PWR0]  15.75,17.65 90 top
U$4  [INT3]  15.75,27.3 90 bottom
U$5  [FSNC2]  18.29,26.29 90 bottom
U$6  [ACL1]  23.37,27.05 90 bottom
U$7  [ADA0]  20.83,26.8 90 bottom
U$8  [MISO13]  23.37,8.51 90 bottom
U$9  [MOSI14]  18.29,8.51 90 bottom
U$10  [SCLK15]  20.83,8.51 90 bottom
U$11  [#CS16]  25.91,8.38 90 bottom
U$12  [1V8#5V57]  15.75,8.51 90 bottom
U$13  [VIN5]  15.75,8.51 90 top
U$14  [NC17]  25.91,8.76 90 top
U$15  [CL4]  20.83,8.51 90 top
U$16  [DA2]  18.29,8.51 90 top
U$17  [AD012]  23.37,8.51 90 top
U$18  [ADA0]  20.83,26.8 90 top
U$19  [ACL1]  23.37,27.05 90 top
U$20  [FSNC2]  18.29,26.29 90 top
U$21  [INT3]  15.75,27.3 90 top
U$22  [GND4]  13.21,8.89 90 top
U$23  [ADR2]  29.97,14.86 90 bottom
U$24  [GND4]  13.21,26.67 90 top
U$25  [I2C_PU21]  12.32,14.48 90 bottom
U$26  [SPI19]  37.34,11.05 90 bottom
U$27  [AUX_PU24]  29.21,19.18 90 bottom
U$28  [ICM#2094820]  56.01,13.72 90 bottom
U$29  [LED23]  17.65,14.35 90 bottom
U$30  [VIN5]  25.91,27.3 90 top
U$31  [ICM#2094820]  23.75,13.72 90 bottom
U$32  [GND4]  45.47,8.89 90 bottom
U$33  [GND4]  45.47,26.67 90 bottom
U$34  [X0]  10.79,26.54 90 top
U$35  [Y1]  7.49,22.61 90 top
U$36  [Z2]  7.49,26.04 90 top
U$37  [G5]  10.92,23.24 90 top
U$38  [A4]  10.92,22.23 90 top
U$39  [M3]  34.62,28.41 270 top
U$40  [X0]  37.64,26.83 90 top
U$41  [Y1]  35.25,24.35 270 top
U$42  [Z2]  37.9,22.77 90 top
U$43  [QWIIC_9DOF_IMU_0]  25.78,11.94 90 bottom
U$44  [VIN5]  25.91,27.3 90 bottom
U$45  [I#C1]  8.23,11.11 90 top
U$46  [INT3]  48.01,27.3 90 bottom
U$47  [FSNC2]  50.55,26.29 90 bottom
U$48  [ACL1]  55.63,27.05 90 bottom
U$49  [ADA0]  53.09,26.8 90 bottom
U$50  [MISO13]  55.63,8.51 90 bottom
U$51  [MOSI14]  50.55,8.51 90 bottom
U$52  [SCLK15]  53.09,8.51 90 bottom
U$53  [#CS16]  58.17,8.38 90 bottom
U$54  [1V8#5V57]  48.01,8.51 90 bottom
U$55  [VIN5]  48.01,8.51 90 top
U$56  [NC17]  58.17,8.76 90 top
U$57  [AD012]  55.63,8.51 90 top
U$58  [ADA0]  53.09,26.8 90 top
U$59  [ACL1]  55.63,27.05 90 top
U$60  [FSNC2]  50.55,26.29 90 top
U$61  [INT3]  48.01,27.3 90 top
U$62  [GND4]  45.47,8.89 90 top
U$63  [SPI19]  69.6,11.05 90 bottom
U$64  [I2C_PU21]  44.58,14.48 90 bottom
U$65  [AUX_PU24]  61.47,19.18 90 bottom
U$66  [LED23]  49.91,14.35 90 bottom
U$67  [X0]  43.05,26.54 90 top
U$68  [Y1]  39.75,22.61 90 top
U$69  [Z2]  39.75,26.04 90 top
U$70  [G5]  43.18,23.24 90 top
U$71  [A4]  43.18,22.23 90 top
U$72  [M3]  66.88,28.41 270 top
U$73  [X0]  69.9,26.83 90 top
U$74  [Y1]  67.51,24.35 270 top
U$75  [Z2]  70.16,22.77 90 top
U$76  [QWIIC_9DOF_IMU_0]  58.04,11.94 90 bottom
U$77  [CL4]  53.09,8.51 90 top
U$78  [DA2]  50.55,8.51 90 top
U$79  [VIN5]  58.17,27.3 90 top
U$80  [VIN5]  58.17,27.3 90 bottom
U$81  [PWR0]  48.01,17.65 90 top
U$82  [I#C1]  40.49,11.11 90 top
U$83  [ADR2]  62.23,14.86 90 bottom
U$84  [GND4]  45.47,26.67 90 top
U$85  [ICM#2094820]  23.75,39.62 90 bottom
U$86  [GND4]  13.21,34.8 90 bottom
U$87  [GND4]  13.21,52.58 90 bottom
U$88  [INT3]  15.75,53.21 90 bottom
U$89  [FSNC2]  18.29,52.2 90 bottom
U$90  [ACL1]  23.37,52.96 90 bottom
U$91  [ADA0]  20.83,52.7 90 bottom
U$92  [MISO13]  23.37,34.42 90 bottom
U$93  [MOSI14]  18.29,34.42 90 bottom
U$94  [SCLK15]  20.83,34.42 90 bottom
U$95  [#CS16]  25.91,34.29 90 bottom
U$96  [1V8#5V57]  15.75,34.42 90 bottom
U$97  [VIN5]  15.75,34.42 90 top
U$98  [NC17]  25.91,34.67 90 top
U$99  [AD012]  23.37,34.42 90 top
U$100  [ADA0]  20.83,52.7 90 top
U$101  [ACL1]  23.37,52.96 90 top
U$102  [FSNC2]  18.29,52.2 90 top
U$103  [INT3]  15.75,53.21 90 top
U$104  [GND4]  13.21,34.8 90 top
U$105  [SPI19]  37.34,36.96 90 bottom
U$106  [I2C_PU21]  12.32,40.39 90 bottom
U$107  [AUX_PU24]  29.21,45.08 90 bottom
U$108  [LED23]  17.65,40.26 90 bottom
U$109  [X0]  10.79,52.45 90 top
U$110  [Y1]  7.49,48.51 90 top
U$111  [Z2]  7.49,51.94 90 top
U$112  [G5]  10.92,49.15 90 top
U$113  [A4]  10.92,48.13 90 top
U$114  [M3]  34.62,54.32 270 top
U$115  [X0]  37.64,52.74 90 top
U$116  [Y1]  35.25,50.26 270 top
U$117  [Z2]  37.9,48.67 90 top
U$118  [QWIIC_9DOF_IMU_0]  25.78,37.85 90 bottom
U$119  [CL4]  20.83,34.42 90 top
U$120  [DA2]  18.29,34.42 90 top
U$121  [VIN5]  25.91,53.21 90 top
U$122  [VIN5]  25.91,53.21 90 bottom
U$123  [PWR0]  15.75,43.56 90 top
U$124  [I#C1]  8.23,37.02 90 top
U$125  [ADR2]  29.97,40.77 90 bottom
U$126  [GND4]  13.21,52.58 90 top
U$127  [ICM#2094820]  56.01,39.62 90 bottom
U$128  [GND4]  45.47,34.8 90 bottom
U$129  [GND4]  45.47,52.58 90 bottom
U$130  [INT3]  48.01,53.21 90 bottom
U$131  [FSNC2]  50.55,52.2 90 bottom
U$132  [ACL1]  55.63,52.96 90 bottom
U$133  [ADA0]  53.09,52.7 90 bottom
U$134  [MISO13]  55.63,34.42 90 bottom
U$135  [MOSI14]  50.55,34.42 90 bottom
U$136  [SCLK15]  53.09,34.42 90 bottom
U$137  [#CS16]  58.17,34.29 90 bottom
U$138  [1V8#5V57]  48.01,34.42 90 bottom
U$139  [VIN5]  48.01,34.42 90 top
U$140  [NC17]  58.17,34.67 90 top
U$141  [AD012]  55.63,34.42 90 top
U$142  [ADA0]  53.09,52.7 90 top
U$143  [ACL1]  55.63,52.96 90 top
U$144  [FSNC2]  50.55,52.2 90 top
U$145  [INT3]  48.01,53.21 90 top
U$146  [GND4]  45.47,34.8 90 top
U$147  [SPI19]  69.6,36.96 90 bottom
U$148  [I2C_PU21]  44.58,40.39 90 bottom
U$149  [AUX_PU24]  61.47,45.08 90 bottom
U$150  [LED23]  49.91,40.26 90 bottom
U$151  [X0]  43.05,52.45 90 top
U$152  [Y1]  39.75,48.51 90 top
U$153  [Z2]  39.75,51.94 90 top
U$154  [G5]  43.18,49.15 90 top
U$155  [A4]  43.18,48.13 90 top
U$156  [M3]  66.88,54.32 270 top
U$157  [X0]  69.9,52.74 90 top
U$158  [Y1]  67.51,50.26 270 top
U$159  [Z2]  70.16,48.67 90 top
U$160  [QWIIC_9DOF_IMU_0]  58.04,37.85 90 bottom
U$161  [CL4]  53.09,34.42 90 top
U$162  [DA2]  50.55,34.42 90 top
U$163  [VIN5]  58.17,53.21 90 top
U$164  [VIN5]  58.17,53.21 90 bottom
U$165  [PWR0]  48.01,43.56 90 top
U$166  [I#C1]  40.49,37.02 90 top
U$167  [ADR2]  62.23,40.77 90 bottom
U$168  [GND4]  45.47,52.58 90 top
U$169  [ICM#2094820]  23.75,65.53 90 bottom
U$170  [GND4]  13.21,60.71 90 bottom
U$171  [GND4]  13.21,78.49 90 bottom
U$172  [INT3]  15.75,79.12 90 bottom
U$173  [FSNC2]  18.29,78.11 90 bottom
U$174  [ACL1]  23.37,78.87 90 bottom
U$175  [ADA0]  20.83,78.61 90 bottom
U$176  [MISO13]  23.37,60.32 90 bottom
U$177  [MOSI14]  18.29,60.32 90 bottom
U$178  [SCLK15]  20.83,60.32 90 bottom
U$179  [#CS16]  25.91,60.2 90 bottom
U$180  [1V8#5V57]  15.75,60.32 90 bottom
U$181  [VIN5]  15.75,60.32 90 top
U$182  [NC17]  25.91,60.58 90 top
U$183  [AD012]  23.37,60.32 90 top
U$184  [ADA0]  20.83,78.61 90 top
U$185  [ACL1]  23.37,78.87 90 top
U$186  [FSNC2]  18.29,78.11 90 top
U$187  [INT3]  15.75,79.12 90 top
U$188  [GND4]  13.21,60.71 90 top
U$189  [SPI19]  37.34,62.86 90 bottom
U$190  [I2C_PU21]  12.32,66.29 90 bottom
U$191  [AUX_PU24]  29.21,70.99 90 bottom
U$192  [LED23]  17.65,66.17 90 bottom
U$193  [X0]  10.79,78.36 90 top
U$194  [Y1]  7.49,74.42 90 top
U$195  [Z2]  7.49,77.85 90 top
U$196  [G5]  10.92,75.06 90 top
U$197  [A4]  10.92,74.04 90 top
U$198  [M3]  34.62,80.23 270 top
U$199  [X0]  37.64,78.65 90 top
U$200  [Y1]  35.25,76.17 270 top
U$201  [Z2]  37.9,74.58 90 top
U$202  [QWIIC_9DOF_IMU_0]  25.78,63.75 90 bottom
U$203  [CL4]  20.83,60.32 90 top
U$204  [DA2]  18.29,60.32 90 top
U$205  [VIN5]  25.91,79.12 90 top
U$206  [VIN5]  25.91,79.12 90 bottom
U$207  [PWR0]  15.75,69.47 90 top
U$208  [I#C1]  8.23,62.93 90 top
U$209  [ADR2]  29.97,66.67 90 bottom
U$210  [GND4]  13.21,78.49 90 top
U$211  [ICM#2094820]  56.01,65.53 90 bottom
U$212  [GND4]  45.47,60.71 90 bottom
U$213  [GND4]  45.47,78.49 90 bottom
U$214  [INT3]  48.01,79.12 90 bottom
U$215  [FSNC2]  50.55,78.11 90 bottom
U$216  [ACL1]  55.63,78.87 90 bottom
U$217  [ADA0]  53.09,78.61 90 bottom
U$218  [MISO13]  55.63,60.32 90 bottom
U$219  [MOSI14]  50.55,60.32 90 bottom
U$220  [SCLK15]  53.09,60.32 90 bottom
U$221  [#CS16]  58.17,60.2 90 bottom
U$222  [1V8#5V57]  48.01,60.32 90 bottom
U$223  [VIN5]  48.01,60.32 90 top
U$224  [NC17]  58.17,60.58 90 top
U$225  [AD012]  55.63,60.32 90 top
U$226  [ADA0]  53.09,78.61 90 top
U$227  [ACL1]  55.63,78.87 90 top
U$228  [FSNC2]  50.55,78.11 90 top
U$229  [INT3]  48.01,79.12 90 top
U$230  [GND4]  45.47,60.71 90 top
U$231  [SPI19]  69.6,62.86 90 bottom
U$232  [I2C_PU21]  44.58,66.29 90 bottom
U$233  [AUX_PU24]  61.47,70.99 90 bottom
U$234  [LED23]  49.91,66.17 90 bottom
U$235  [X0]  43.05,78.36 90 top
U$236  [Y1]  39.75,74.42 90 top
U$237  [Z2]  39.75,77.85 90 top
U$238  [G5]  43.18,75.06 90 top
U$239  [A4]  43.18,74.04 90 top
U$240  [M3]  66.88,80.23 270 top
U$241  [X0]  69.9,78.65 90 top
U$242  [Y1]  67.51,76.17 270 top
U$243  [Z2]  70.16,74.58 90 top
U$244  [QWIIC_9DOF_IMU_0]  58.04,63.75 90 bottom
U$245  [CL4]  53.09,60.32 90 top
U$246  [DA2]  50.55,60.32 90 top
U$247  [VIN5]  58.17,79.12 90 top
U$248  [VIN5]  58.17,79.12 90 bottom
U$249  [PWR0]  48.01,69.47 90 top
U$250  [I#C1]  40.49,62.93 90 top
U$251  [ADR2]  62.23,66.67 90 bottom
U$252  [GND4]  45.47,78.49 90 top

## Library data of the parts
C1 C4 C7 C8 C11 C12 C15 C16 C19 C20 C23 C24 = SparkFun-Capacitors; PROD_ID: CAP-13930
C2 C3 C5 C6 C9 C10 C13 C14 C17 C18 C21 C22 = SparkFun-Capacitors; PROD_ID: CAP-08604
D1-D6 = SparkFun-LED; PROD_ID: DIO-00819
E$1 E$2 FD1-FD24 LOGO1-LOGO12 = SparkFun-Aesthetics
E$3 = SparkFun-Retired
H1-H24 = SparkFun-Hardware
J1 J2 J5 J6 J9 J10 J13 J14 J17 J18 J21 J22 = SparkFun-Connectors; PROD_ID: CONN-13694
J3 J4 J7 J8 J11 J12 J15 J16 J19 J20 J23 J24 TP1-TP6 = SparkFun-Connectors
JP1-JP24 = SparkFun-Jumpers
Q1-Q96 U1 U4-U18 U21-U36 U39-U54 U57-U72 U75-U90 U93-U108 = new_fets
R1 R9 R35 R52 R69 R86 = SparkFun-Resistors; PROD_ID: RES-07869
R2-R8 R10-R34 R36-R51 R53-R68 R70-R85 R87-R102 = SparkFun-Resistors; PROD_ID: RES-14341
U2 U20 U38 U56 U74 U92 = SparkFun-Sensors; PROD_ID: IC-14247
U3 U19 U37 U55 U73 U91 = SparkFun-IC-Power; PROD_ID: VREG-08428
U$1 U$2 U$4-U$14 U$17-U$22 U$24-U$27 U$29 U$30 U$32 U$33 U$44 U$46-U$66 U$79 U$80 U$84 U$86-U$108 U$121 U$122 U$126 U$128-U$150 U$163 U$164 U$168 U$170-U$192 U$205 U$206 U$210 U$212-U$234 U$247 U$248 U$252 = buzzard_labels_2
U$3 U$23 U$45 U$81-U$83 U$123-U$125 U$165-U$167 U$207-U$209 U$249-U$251 = buzzard_labels_4
U$15 U$16 U$28 U$31 U$43 U$76-U$78 U$85 U$118-U$120 U$127 U$160-U$162 U$169 U$202-U$204 U$211 U$244-U$246 = buzzard_labels
U$34-U$42 U$67-U$75 U$109-U$117 U$151-U$159 U$193-U$201 U$235-U$243 = buzzard_labels (1)

## Nets
1.8V: C1.1 C2.1 D1.A Q1.G Q2.1 Q3.G Q4.1 Q5.G Q6.1 Q7.G Q8.1 Q9.G Q10.1 Q11.G Q12.1 Q13.G Q14.1 Q15.G Q16.1 R10.2 R12.2 R14.2 R16.2 R18.2 R20.2 R22.2 R24.2 TP1.P$1 U2.8 U2.13 U3.5
1.8V1: C6.1 C7.1 D2.A Q17.G Q18.1 Q19.G Q20.1 Q21.G Q22.1 Q23.G Q24.1 Q25.G Q26.1 Q27.G Q28.1 Q29.G Q30.1 Q31.G Q32.1 R2.2 R4.2 R6.2 R8.2 R27.2 R29.2 R31.2 R33.2 TP2.P$1 U19.5 U20.8 U20.13
1.8V2: C10.1 C11.1 D3.A Q33.G Q34.1 Q35.G Q36.1 Q37.G Q38.1 Q39.G Q40.1 Q41.G Q42.1 Q43.G Q44.1 Q45.G Q46.1 Q47.G Q48.1 R36.2 R38.2 R40.2 R42.2 R44.2 R46.2 R48.2 R50.2 TP3.P$1 U37.5 U38.8 U38.13
1.8V3: C14.1 C15.1 D4.A Q49.G Q50.1 Q51.G Q52.1 Q53.G Q54.1 Q55.G Q56.1 Q57.G Q58.1 Q59.G Q60.1 Q61.G Q62.1 Q63.G Q64.1 R53.2 R55.2 R57.2 R59.2 R61.2 R63.2 R65.2 R67.2 TP4.P$1 U55.5 U56.8 U56.13
1.8V4: C18.1 C19.1 D5.A Q65.G Q66.1 Q67.G Q68.1 Q69.G Q70.1 Q71.G Q72.1 Q73.G Q74.1 Q75.G Q76.1 Q77.G Q78.1 Q79.G Q80.1 R70.2 R72.2 R74.2 R76.2 R78.2 R80.2 R82.2 R84.2 TP5.P$1 U73.5 U74.8 U74.13
1.8V5: C22.1 C23.1 D6.A Q81.G Q82.1 Q83.G Q84.1 Q85.G Q86.1 Q87.G Q88.1 Q89.G Q90.1 Q91.G Q92.1 Q93.G Q94.1 Q95.G Q96.1 R87.2 R89.2 R91.2 R93.2 R95.2 R97.2 R99.2 R101.2 TP6.P$1 U91.5 U92.8 U92.13
!CS: Q1.S Q2.2 R10.1 U2.22 U17.P$1
!CS1: Q17.S Q18.2 R2.1 U20.22 U35.P$1
!CS2: Q33.S Q34.2 R36.1 U38.22 U53.P$1
!CS3: Q49.S Q50.2 R53.1 U56.22 U71.P$1
!CS4: Q65.S Q66.2 R70.1 U74.22 U89.P$1
!CS5: Q81.S Q82.2 R87.1 U92.22 U107.P$1
!CS!_VIN: J3.6 Q1.D Q2.3 R11.1 U18.P$1
!CS!_VIN1: J7.6 Q17.D Q18.3 R3.1 U36.P$1
!CS!_VIN2: J11.6 Q33.D Q34.3 R37.1 U54.P$1
!CS!_VIN3: J15.6 Q49.D Q50.3 R54.1 U72.P$1
!CS!_VIN4: J19.6 Q65.D Q66.3 R71.1 U90.P$1
!CS!_VIN5: J23.6 Q81.D Q82.3 R88.1 U108.P$1
AD0/SDO: Q3.S Q4.2 R12.1 U2.9 U15.P$1
AD0/SDO1: Q19.S Q20.2 R4.1 U20.9 U33.P$1
AD0/SDO2: Q35.S Q36.2 R38.1 U38.9 U51.P$1
AD0/SDO3: Q51.S Q52.2 R55.1 U56.9 U69.P$1
AD0/SDO4: Q67.S Q68.2 R72.1 U74.9 U87.P$1
AD0/SDO5: Q83.S Q84.2 R89.1 U92.9 U105.P$1
AD0/SDO_VIN: J3.5 JP2.2 Q3.D Q4.3 R13.1 U16.P$1
AD0/SDO_VIN1: J7.5 JP8.2 Q19.D Q20.3 R5.1 U34.P$1
AD0/SDO_VIN2: J11.5 JP12.2 Q35.D Q36.3 R39.1 U52.P$1
AD0/SDO_VIN3: J15.5 JP16.2 Q51.D Q52.3 R56.1 U70.P$1
AD0/SDO_VIN4: J19.5 JP20.2 Q67.D Q68.3 R73.1 U88.P$1
AD0/SDO_VIN5: J23.5 JP24.2 Q83.D Q84.3 R90.1 U106.P$1
AUX_CL: Q11.S Q12.2 R20.1 U2.7 U5.P$1
AUX_CL1: Q27.S Q28.2 R29.1 U20.7 U23.P$1
AUX_CL2: Q43.S Q44.2 R46.1 U38.7 U41.P$1
AUX_CL3: Q59.S Q60.2 R63.1 U56.7 U59.P$1
AUX_CL4: Q75.S Q76.2 R80.1 U74.7 U77.P$1
AUX_CL5: Q91.S Q92.2 R97.1 U92.7 U95.P$1
AUX_CL_VIN: J4.5 Q11.D Q12.3 R21.1 U6.P$1
AUX_CL_VIN1: J8.5 Q27.D Q28.3 R30.1 U24.P$1
AUX_CL_VIN2: J12.5 Q43.D Q44.3 R47.1 U42.P$1
AUX_CL_VIN3: J16.5 Q59.D Q60.3 R64.1 U60.P$1
AUX_CL_VIN4: J20.5 Q75.D Q76.3 R81.1 U78.P$1
AUX_CL_VIN5: J24.5 Q91.D Q92.3 R98.1 U96.P$1
AUX_CL_VIN_JMP: JP3.1 R21.2
AUX_CL_VIN_JMP1: JP1.1 R30.2
AUX_CL_VIN_JMP2: JP9.1 R47.2
AUX_CL_VIN_JMP3: JP13.1 R64.2
AUX_CL_VIN_JMP4: JP17.1 R81.2
AUX_CL_VIN_JMP5: JP21.1 R98.2
AUX_DA: Q9.S Q10.2 R18.1 U1.P$1 U2.21
AUX_DA1: Q25.S Q26.2 R27.1 U20.21 U21.P$1
AUX_DA2: Q41.S Q42.2 R44.1 U38.21 U39.P$1
AUX_DA3: Q57.S Q58.2 R61.1 U56.21 U57.P$1
AUX_DA4: Q73.S Q74.2 R78.1 U74.21 U75.P$1
AUX_DA5: Q89.S Q90.2 R95.1 U92.21 U93.P$1
AUX_DA_VIN: J4.4 Q9.D Q10.3 R19.1 U4.P$1
AUX_DA_VIN1: J8.4 Q25.D Q26.3 R28.1 U22.P$1
AUX_DA_VIN2: J12.4 Q41.D Q42.3 R45.1 U40.P$1
AUX_DA_VIN3: J16.4 Q57.D Q58.3 R62.1 U58.P$1
AUX_DA_VIN4: J20.4 Q73.D Q74.3 R79.1 U76.P$1
AUX_DA_VIN5: J24.4 Q89.D Q90.3 R96.1 U94.P$1
AUX_DA_VIN_JMP: JP3.3 R19.2
AUX_DA_VIN_JMP1: JP1.3 R28.2
AUX_DA_VIN_JMP2: JP9.3 R45.2
AUX_DA_VIN_JMP3: JP13.3 R62.2
AUX_DA_VIN_JMP4: JP17.3 R79.2
AUX_DA_VIN_JMP5: JP21.3 R96.2
FSYNC: Q13.S Q14.2 R22.1 U2.11 U8.P$1
FSYNC1: Q29.S Q30.2 R31.1 U20.11 U26.P$1
FSYNC2: Q45.S Q46.2 R48.1 U38.11 U44.P$1
FSYNC3: Q61.S Q62.2 R65.1 U56.11 U62.P$1
FSYNC4: Q77.S Q78.2 R82.1 U74.11 U80.P$1
FSYNC5: Q93.S Q94.2 R99.1 U92.11 U98.P$1
FSYNC_VIN: J4.3 Q13.D Q14.3 R23.1 U7.P$1
FSYNC_VIN1: J8.3 Q29.D Q30.3 R32.1 U25.P$1
FSYNC_VIN2: J12.3 Q45.D Q46.3 R49.1 U43.P$1
FSYNC_VIN3: J16.3 Q61.D Q62.3 R66.1 U61.P$1
FSYNC_VIN4: J20.3 Q77.D Q78.3 R83.1 U79.P$1
FSYNC_VIN5: J24.3 Q93.D Q94.3 R100.1 U97.P$1
GND: C1.2 C2.2 C3.2 C4.2 J1.1 J2.1 J3.1 J4.1 JP2.1 JP5.1 U2.18 U2.20 U3.2
GND1: C5.2 C6.2 C7.2 C8.2 J5.1 J6.1 J7.1 J8.1 JP7.1 JP8.1 U19.2 U20.18 U20.20
GND2: C9.2 C10.2 C11.2 C12.2 J9.1 J10.1 J11.1 J12.1 JP11.1 JP12.1 U37.2 U38.18 U38.20
GND3: C13.2 C14.2 C15.2 C16.2 J13.1 J14.1 J15.1 J16.1 JP15.1 JP16.1 U55.2 U56.18 U56.20
GND4: C17.2 C18.2 C19.2 C20.2 J17.1 J18.1 J19.1 J20.1 JP19.1 JP20.1 U73.2 U74.18 U74.20
GND5: C21.2 C22.2 C23.2 C24.2 J21.1 J22.1 J23.1 J24.1 JP23.1 JP24.1 U91.2 U92.18 U92.20
INT: Q15.S Q16.2 R24.1 U2.12 U9.P$1
INT1: Q31.S Q32.2 R33.1 U20.12 U27.P$1
INT2: Q47.S Q48.2 R50.1 U38.12 U45.P$1
INT3: Q63.S Q64.2 R67.1 U56.12 U63.P$1
INT4: Q79.S Q80.2 R84.1 U74.12 U81.P$1
INT5: Q95.S Q96.2 R101.1 U92.12 U99.P$1
INT_VIN: J4.2 Q15.D Q16.3 R25.1 U10.P$1
INT_VIN1: J8.2 Q31.D Q32.3 R34.1 U28.P$1
INT_VIN2: J12.2 Q47.D Q48.3 R51.1 U46.P$1
INT_VIN3: J16.2 Q63.D Q64.3 R68.1 U64.P$1
INT_VIN4: J20.2 Q79.D Q80.3 R85.1 U82.P$1
INT_VIN5: J24.2 Q95.D Q96.3 R102.1 U100.P$1
N$1: C3.1 U2.10
N$2: C5.1 U20.10
N$3: D2.C R1.2
N$4: JP7.2 R1.1
N$6: C9.1 U38.10
N$7: D3.C R35.2
N$8: JP11.2 R35.1
N$9: D1.C R9.2
N$10: JP5.2 R9.1
N$12: C13.1 U56.10
N$13: D4.C R52.2
N$14: JP15.2 R52.1
N$16: C17.1 U74.10
N$17: D5.C R69.2
N$18: JP19.2 R69.1
N$20: C21.1 U92.10
N$21: D6.C R86.2
N$22: JP23.2 R86.1
SCL/SCLK: Q5.S Q6.2 R14.1 U2.23 U13.P$1
SCL/SCLK1: Q21.S Q22.2 R6.1 U20.23 U31.P$1
SCL/SCLK2: Q37.S Q38.2 R40.1 U38.23 U49.P$1
SCL/SCLK3: Q53.S Q54.2 R57.1 U56.23 U67.P$1
SCL/SCLK4: Q69.S Q70.2 R74.1 U74.23 U85.P$1
SCL/SCLK5: Q85.S Q86.2 R91.1 U92.23 U103.P$1
SCL/SCLK_VIN: J1.4 J2.4 J3.4 Q5.D Q6.3 R15.1 U14.P$1
SCL/SCLK_VIN1: J5.4 J6.4 J7.4 Q21.D Q22.3 R7.1 U32.P$1
SCL/SCLK_VIN2: J9.4 J10.4 J11.4 Q37.D Q38.3 R41.1 U50.P$1
SCL/SCLK_VIN3: J13.4 J14.4 J15.4 Q53.D Q54.3 R58.1 U68.P$1
SCL/SCLK_VIN4: J17.4 J18.4 J19.4 Q69.D Q70.3 R75.1 U86.P$1
SCL/SCLK_VIN5: J21.4 J22.4 J23.4 Q85.D Q86.3 R92.1 U104.P$1
SCL/SCLK_VIN_JMP: JP4.3 R15.2
SCL/SCLK_VIN_JMP1: JP6.3 R7.2
SCL/SCLK_VIN_JMP2: JP10.3 R41.2
SCL/SCLK_VIN_JMP3: JP14.3 R58.2
SCL/SCLK_VIN_JMP4: JP18.3 R75.2
SCL/SCLK_VIN_JMP5: JP22.3 R92.2
SDA/SDI: Q7.S Q8.2 R16.1 U2.24 U11.P$1
SDA/SDI1: Q23.S Q24.2 R8.1 U20.24 U29.P$1
SDA/SDI2: Q39.S Q40.2 R42.1 U38.24 U47.P$1
SDA/SDI3: Q55.S Q56.2 R59.1 U56.24 U65.P$1
SDA/SDI4: Q71.S Q72.2 R76.1 U74.24 U83.P$1
SDA/SDI5: Q87.S Q88.2 R93.1 U92.24 U101.P$1
SDA/SDI_VIN: J1.3 J2.3 J3.3 Q7.D Q8.3 R17.1 U12.P$1
SDA/SDI_VIN1: J5.3 J6.3 J7.3 Q23.D Q24.3 R26.1 U30.P$1
SDA/SDI_VIN2: J9.3 J10.3 J11.3 Q39.D Q40.3 R43.1 U48.P$1
SDA/SDI_VIN3: J13.3 J14.3 J15.3 Q55.D Q56.3 R60.1 U66.P$1
SDA/SDI_VIN4: J17.3 J18.3 J19.3 Q71.D Q72.3 R77.1 U84.P$1
SDA/SDI_VIN5: J21.3 J22.3 J23.3 Q87.D Q88.3 R94.1 U102.P$1
SDA/SDI_VIN_JMP: JP4.1 R17.2
SDA/SDI_VIN_JMP1: JP6.1 R26.2
SDA/SDI_VIN_JMP2: JP10.1 R43.2
SDA/SDI_VIN_JMP3: JP14.1 R60.2
SDA/SDI_VIN_JMP4: JP18.1 R77.2
SDA/SDI_VIN_JMP5: JP22.1 R94.2
VIN: C4.1 J1.2 J2.2 J3.2 J4.6 JP3.2 JP4.2 R11.2 R13.2 R23.2 R25.2 U3.1 U3.3
VIN1: C8.1 J5.2 J6.2 J7.2 J8.6 JP1.2 JP6.2 R3.2 R5.2 R32.2 R34.2 U19.1 U19.3
VIN2: C12.1 J9.2 J10.2 J11.2 J12.6 JP9.2 JP10.2 R37.2 R39.2 R49.2 R51.2 U37.1 U37.3
VIN3: C16.1 J13.2 J14.2 J15.2 J16.6 JP13.2 JP14.2 R54.2 R56.2 R66.2 R68.2 U55.1 U55.3
VIN4: C20.1 J17.2 J18.2 J19.2 J20.6 JP17.2 JP18.2 R71.2 R73.2 R83.2 R85.2 U73.1 U73.3
VIN5: C24.1 J21.2 J22.2 J23.2 J24.6 JP21.2 JP22.2 R88.2 R90.2 R100.2 R102.2 U91.1 U91.3